# Altium PCB Arduino Nano.PcbDoc
Units mil, origin at the board's own origin, x right, y up, seen from the top; angles counter-clockwise.
Board outline 730 x 1700 mil, 4 copper layers (Top Layer, Signal Layer Top, Signal Layer Bottom, Bottom Layer), stack 23.756 mil thick; 25 components, 41 nets, 170 pads, 45 vias.
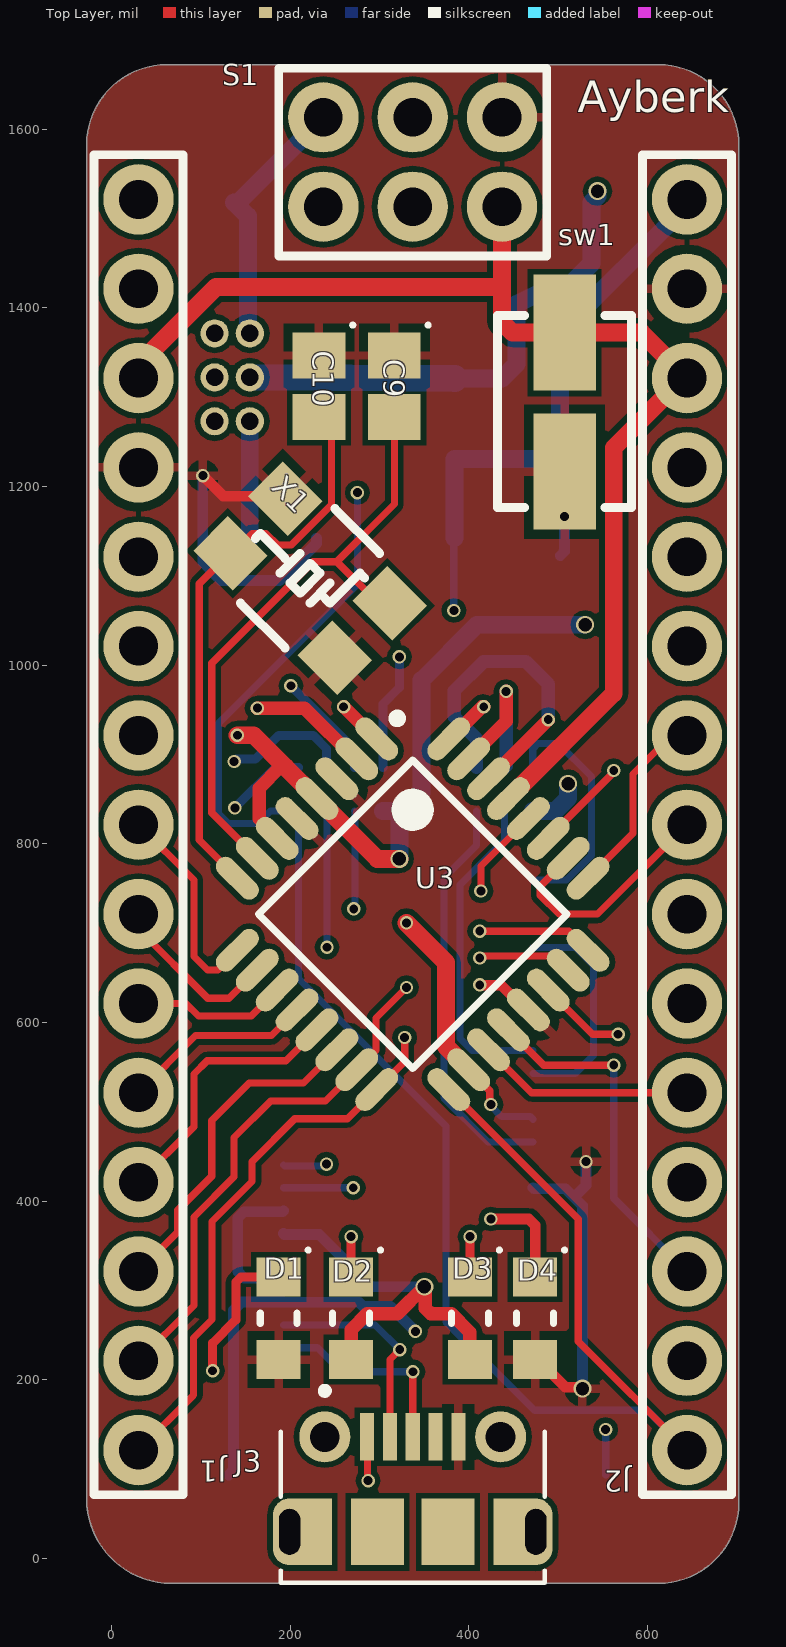
[diagram p0: Top Layer view]
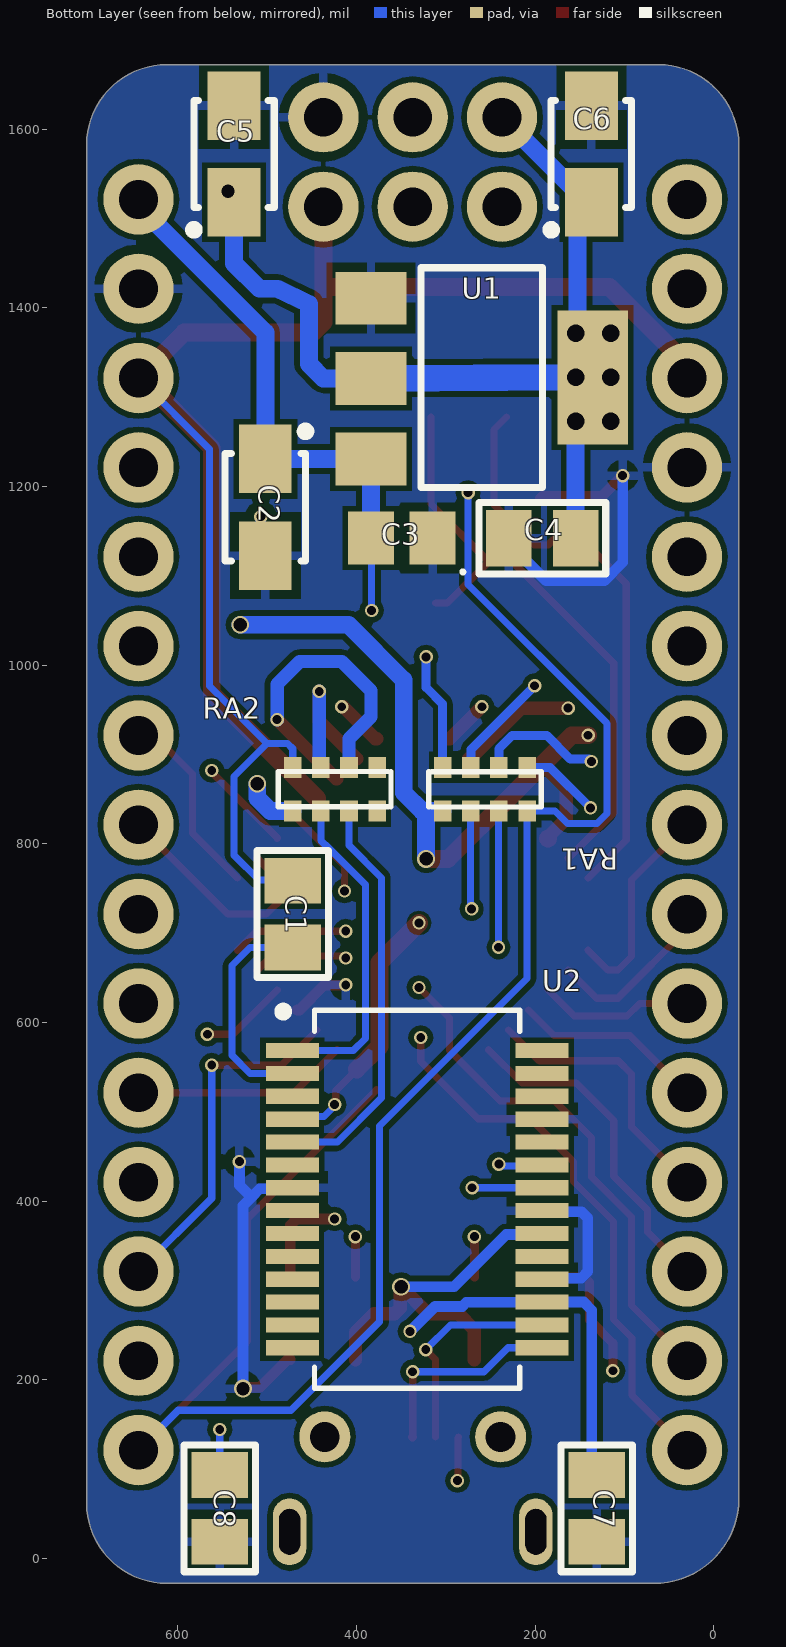
[diagram p1: Bottom Layer view, seen from below]
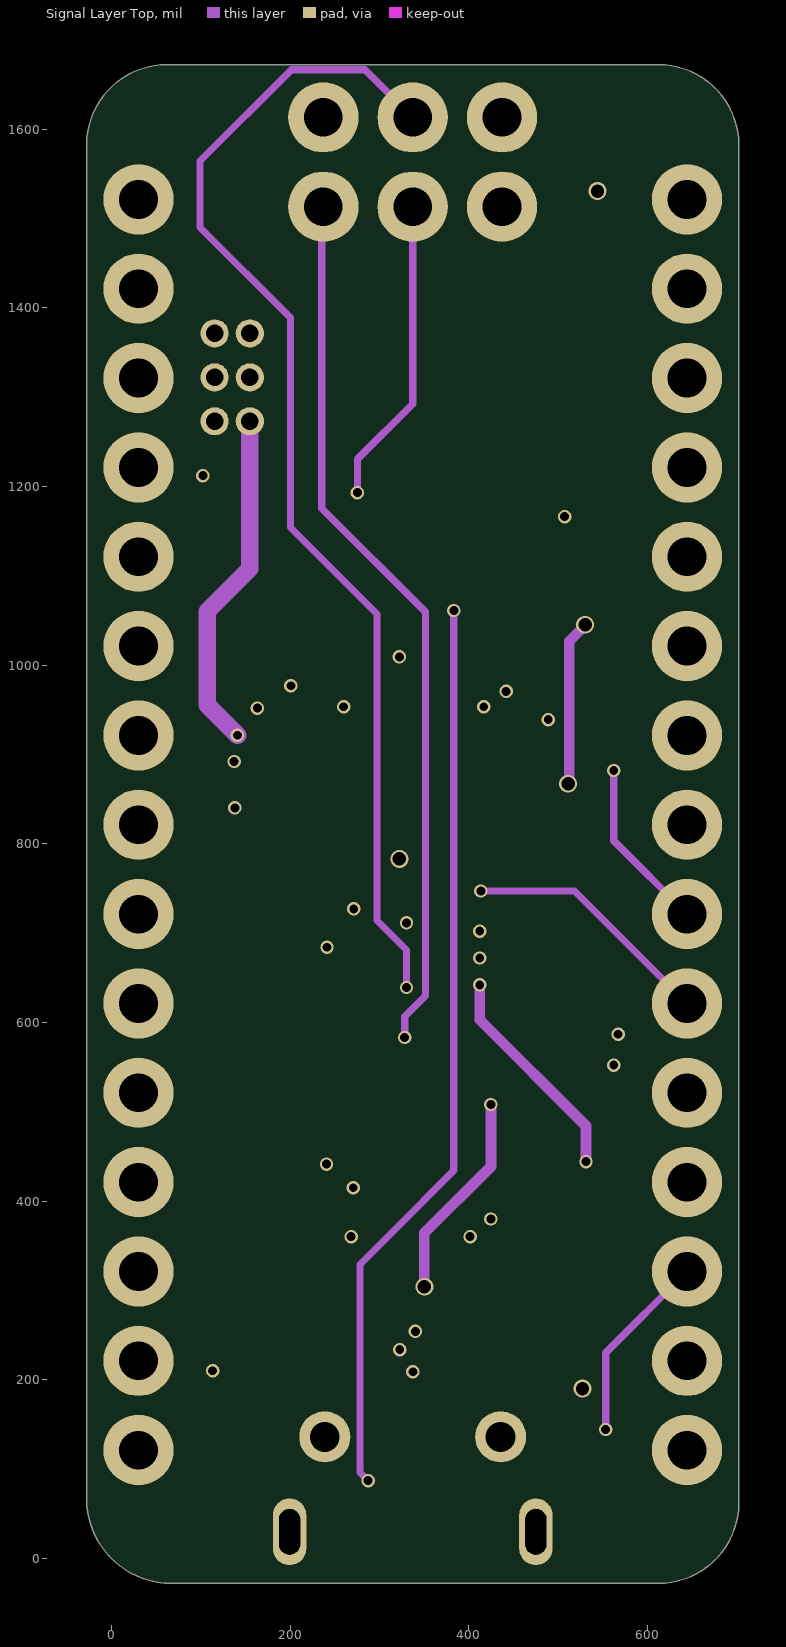
[diagram p2: Signal Layer Top]
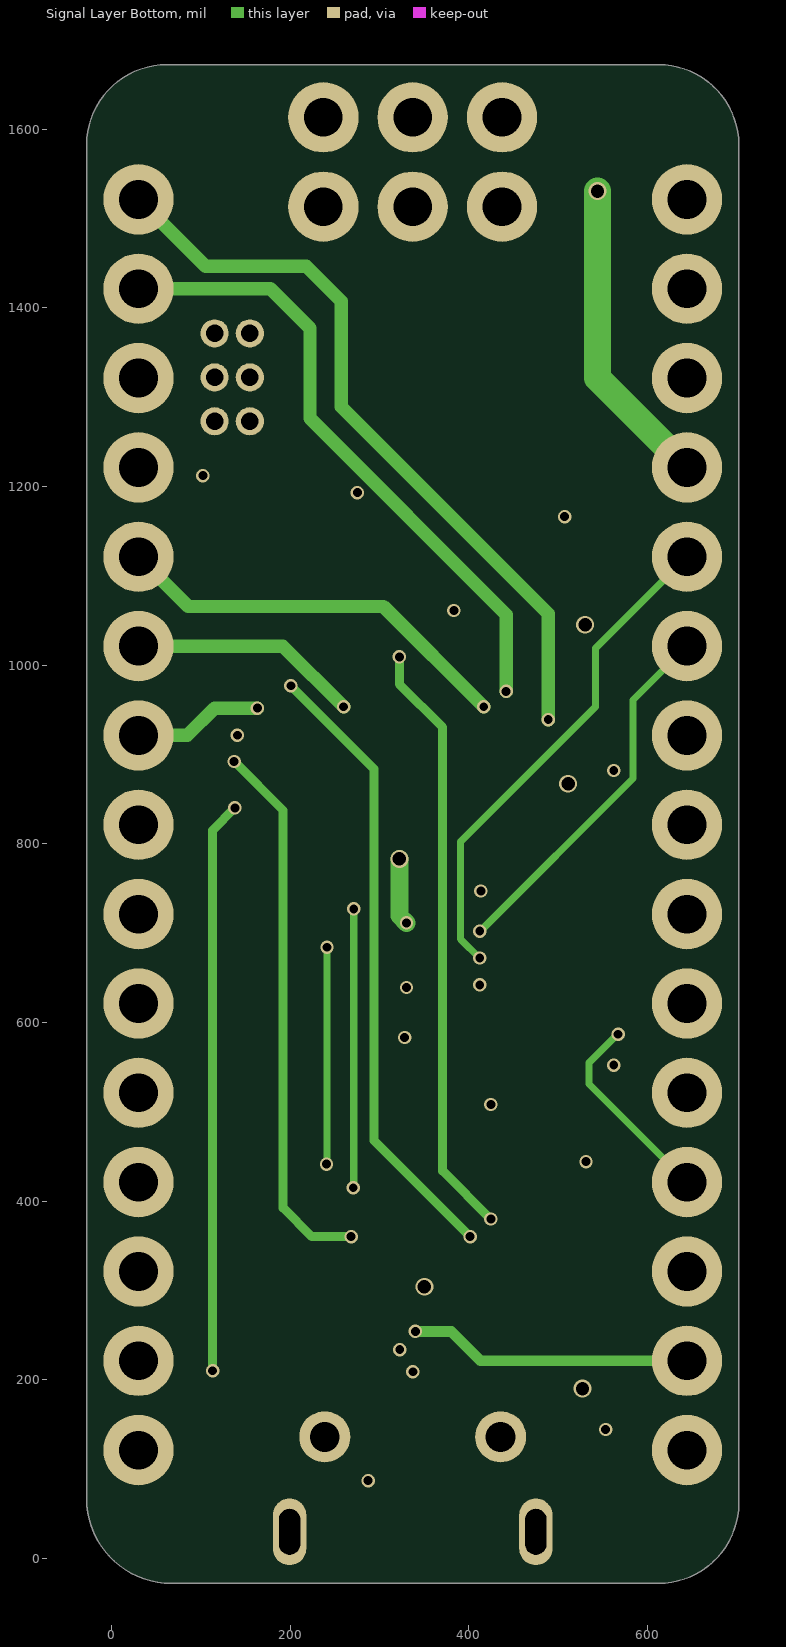
[diagram p3: Signal Layer Bottom]

## Layer stack, top to bottom
Top Solder: solder mask 0.4, Solder Resist, Dk 3.5
Top Layer: signal copper 1.4
Dielectric 3: prepreg 2.8, PP-006, Dk 4.1
Signal Layer Top: signal copper 1.3779
Dielectric 2: prepreg 2.8, PP-006, Dk 4.1
Signal Layer Bottom: signal copper 1.3779
Dielectric 1: dielectric 12.6, FR-4, Dk 4.8
Bottom Layer: signal copper 1.4
Bottom Solder: solder mask 0.4, Solder Resist, Dk 3.5

## Board outline
-27.82,67.18 -27.82,1582.18 cw(c62.18,1582.18) 62.18,1672.18 612.18,1672.18 cw(c612.18,1582.18) 702.18,1582.18 702.18,62.18 cw(c612.18,62.18) 612.18,-27.82 67.18,-27.82 cw(c67.18,67.18)

## Design rules (kind name [scope] priority, off if disabled: settings)
Clearance [All] p1: gap=6 ignorepadtopadclearanceinfootprint=FALSE
MinimumSolderMaskSliver [All] p1: minsoldermaskwidth=1
PolygonConnect [All] p1: connectstyle=Relief reliefconductorwidth=10 reliefentries=4 polygonreliefangle="90 Angle" airgapwidth=10
RoutingVias [All] p1: holewidth=10 width=15 viastyle="Through Hole" minholewidth=10 minwidth=15 maxholewidth=28 maxwidth=50
SilkToSilkClearance [All] p1: silktosilkclearance=6
SilkToSolderMaskClearance [IsPad] p1: minsilkscreentomaskgap=0 clearancetoexposedcopper=TRUE
SolderMaskExpansion [All] p1: expansion=4
Width [All] p1: maxlimit=30 minlimit=8 preferedwidth=8 minimp=50.000000 maximp=50.000000 favimp=50.000000
27 further rules are at their usual default settings.

## Components (designator, comment, footprint, x,y, rotation, side; value= is the part's Value field where it differs from the comment)
C1 "100nF" MY_0805 471.52,721.32 r270 bottom
C2 "Capacitor SMT Tantalum" "CASE A - 3216X18" 502.18,1176.69 r270 bottom value=4.7µF
C3 "100nF Ceramic Multilayer Capacitor_1" CAPCP2012X09N 349.42,1142.18 r0 bottom
C4 "100nF" MY_0805 192.18,1142.18 r180 bottom
C5 "Capacitor SMT Tantalum" "CASE A - 3216X18" 537.18,1572.18 r90 bottom value=4.7µF
C6 "Capacitor SMT Tantalum" "CASE A - 3216X18" 137.18,1572.18 r90 bottom value=4.7µF
C7 "100nF" MY_0805 131.18,56.18 r90 bottom
C8 "100nF" MY_0805 553.18,56.18 r90 bottom
C9 "C0805C180J5GACTU" CAPCP2012X09N 316.61,1312.18 r270 top
C10 "C0805C180J5GACTU" CAPCP2012X09N 232.18,1312.18 r270 top
D1 "Kingbright Orange LED, 200 mcd 120 ° 0805" LED1913X12NYEL/ORANGE 187.18,268.92 r270 top
D2 "Kingbright Green LED, 70 mcd 120 ° 0805" LED1913X12NGREEN 268.18,268.92 r270 top
D3 "Kingbright Red LED, 100 mcd 120 ° 0805" LED1913X12NRED 401.18,268.92 r270 top
D4 "Kingbright Blue LED, 60 mcd 120 ° 0805" LED1913X12NBLUE 474.18,268.92 r270 top
J1 "connector;str header;single row;.1 cont centers;.095 tail;gold or gtx;36 contact" Header 30.18,1521.32 r270 top
J2 "connector;str header;single row;.1 cont centers;.095 tail;gold or gtx;36 contact" Header 644.18,1521.32 r270 top
J3 "Molex - Micro USB" MOLEX_1050170001 337.18,43.66 r0 top
RA1 "680+- 5% SMT Resistor Array" "1206 RA" 209.18,841.6 r0 bottom
RA2 "1k +- 5% SMT Resistor Array" "1206 RA" 471.52,880.6 r180 bottom
S1 "Programming Headers Dual Row" "ISP HEADER" 237.18,1513.18 r0 top
sw1 "Tac switch" MY_PB-SMD 507.18,1216.59 r90 top
U1 "LM1117" MY_SOT223 257.18,1322.18 r270 bottom
U2 "FT232RL" SSOP-28-FT232RL 332.18,402.18 r180 bottom
U3 "ATMEGA328P-AU" TQFP80P900X900X120-32N 337.18,721.18 r315 top
X1 "Aker 16MHz Crystal SMT" "Aker S5C Crystal" 311.34,1069.5 r315 top value=16MHz

## Footprints (in the part's own frame and the unit in brackets; to place one, negate y for a bottom-side part, rotate by r counter-clockwise, add the part's x,y. Pads: shape width x height; smd on the part's side, far side on the other; paste and mask are expansions set on the pad)
"1206 RA" [mm]
  rect 0.5x0.6 smd: 1(0,0.127) 2(0.8,0.127) 3(1.6,0.127) 4(2.4,0.127) 5(0,-1.118) 6(0.8,-1.118) 7(1.6,-1.118) 8(2.4,-1.118)
  silkscreen extent -0.41,-0.99 2.79,0.01, body extent -0.41,-1.31 2.79,0.29, height 0.5
"Aker S5C Crystal" [mm]
  rect 1.6x1.4 smd: 1(0,0) 2(-4.2,0) 3(0,-2.2) 4(-4.2,-2.2)
  round 0.254 on Top Overlay: 5(-3,-2.4)
  silkscreen extent -4,-3 -1,0.8, body extent -4.7,-2.8 0.5,0.6, height 1
CAPCP2012X09N [mm] "Chip Capacitor, 2-Leads, Body 2.00x1.25mm, IPC Medium Density"
  rect 1.3x1.5 smd: 1(-0.875,0) 2(0.875,0)
  silkscreen extent -1.79,0.91 -1.69,1.01, body extent -1.05,-0.57 0.95,0.68, height 0.78
"CASE A - 3216X18" [mm] "Molded Capacitor, 2-Leads, Body 3.2x1.6mm, IPC Medium Density"
  rect 1.95x1.5 smd: 1(-1.375,0) 2(1.375,0)
  silkscreen extent -2.28,-1.14 1.52,1.27, body extent -1.52,-0.76 1.65,0.84, height 1.77
Header [mm] "SIL Header"
  round 2 hole 1.1: 1(0,0) 2(2.54,0) 3(5.08,0) 4(7.62,0) 5(10.16,0) 6(12.7,0) 7(15.24,0) 8(17.78,0) 9(20.32,0) 10(22.86,0) 11(25.4,0) 12(27.94,0) 13(30.48,0) 14(33.02,0) 15(35.56,0)
  silkscreen extent -1.27,-1.27 36.83,1.27, body extent -1.33,-1.35 36.93,1.35, height 8.6
"ISP HEADER" [mm] "SIL Header for programming"
  round 2 hole 1.1: 1(0,0) 2(0,2.54) 3(2.54,0) 4(2.54,2.54) 5(5.08,0) 6(5.08,2.54)
  silkscreen extent -1.27,-1.4 6.35,3.94, body extent -1.27,-1.27 6.35,3.81, height 8
LED1913X12NBLUE [mm] "LED 2-Leads, Body 1.90x1.32mm, IPC Medium Density"
  rect 1.1x1.25 smd: 1(-1.175,0) 2(1.175,0)
  silkscreen extent -1.99,-0.53 0.15,0.89, body extent -1,-0.62 1.02,0.62, height 1.1
LED1913X12NGREEN [mm] "LED 2-Leads, Body 1.90x1.32mm, IPC Medium Density"
  rect 1.1x1.25 smd: 1(-1.175,0) 2(1.175,0)
  silkscreen extent -1.99,-0.53 0.15,0.89, body extent -1.01,-0.62 1.01,0.63, height 1.1
LED1913X12NRED [mm] "LED 2-Leads, Body 1.90x1.32mm, IPC Medium Density"
  rect 1.1x1.25 smd: 1(-1.175,0) 2(1.175,0)
  silkscreen extent -1.99,-0.53 0.15,0.89, body extent -1.02,-0.43 1.04,0.47, height 0.85
LED1913X12NYEL/ORANGE [mm] "LED 2-Leads, Body 1.90x1.32mm, IPC Medium Density"
  rect 1.1x1.25 smd: 1(-1.175,0) 2(1.175,0)
  silkscreen extent -1.99,-0.53 0.15,0.89, body extent -1.01,-0.62 1.01,0.63, height 1.1
MOLEX_1050170001 [mm]
  rect 0.4x1.35 smd: 1(-1.3,2.35) 2(-0.65,2.35) 3(0,2.35) 4(0.65,2.35)
  rect 0.4x1.35 smd mask+0.102: 5(1.3,2.35)
  round 1.45 hole 0.85: SH1(-2.5,2.35) SH2(2.5,2.35)
  oval 0.95x1.9 hole 0.6 slot 1.3 at 90 deg: SH3(-3.5,-0.35) SH8(3.5,-0.35)
  rect 1.2x1.9 smd: SH4(-2.9,-0.35) SH7(2.9,-0.35)
  rect 1.5x1.9 smd: SH5(-1,-0.35) SH6(1,-0.35)
  silkscreen extent -3.75,-1.8 3.75,3.76, body extent -4,-2.82 4,2.58, height 2.75
MY_0805 [mm]
  rect 1.3x1.6 smd: 1(-0.95,0) 2(0.95,0)
  silkscreen extent -1.8,-1.02 1.8,1.02, body extent -1,-0.62 1,0.63, height 0.59
MY_PB-SMD [mil] "Switch; 2 Leads"
  rect 130x70 smd: 1(0,0) 2(155.59,0)
  silkscreen extent -40,-75 175,75, body extent -1,-49 156,49, height 63
MY_SOT223 [mm]
  rect 1.499x2.007 smd: 1(-2.252,-3.218) 2(0.034,-3.218) 3(2.32,-3.218)
  round 0.8 hole 0.5: 2(-1.25,2.6) 2(-1.25,3.6) 2(0,2.6) 2(0,3.6) 2(1.25,2.6) 2(1.25,3.6)
  rect 3.81x2.007 smd: 2(0.009,3.081)
  silkscreen extent -3.12,-1.8 3.13,1.66, body extent -3.25,-3.68 3.25,3.32, height 1.67
SSOP-28-FT232RL [mil] "FT232R USB UART IC"
  rect 59.5x17 smd paste+0 mask+0: 1(-139.75,166.34) 2(-139.75,140.75) 3(-139.75,115.16) 4(-139.75,89.57) 5(-139.75,63.98) 6(-139.75,38.39) 7(-139.75,12.8) 8(-139.75,-12.8) 9(-139.75,-38.39) 10(-139.75,-63.98) 11(-139.75,-89.57) 12(-139.75,-115.16) 13(-139.75,-140.75) 14(-139.75,-166.34) 15(139.75,-166.34) 17(139.75,-115.16) 18(139.75,-89.57) 19(139.75,-63.98) 20(139.75,-38.39) 21(139.75,-12.8) 22(139.75,12.8) 23(139.75,38.39) 24(139.75,63.98) 25(139.75,89.57) 26(139.75,115.16) 27(139.75,140.75) 28(139.75,166.34)
  rect 59.5x17 smd paste+0 mask+4: 16(139.75,-140.75)
  silkscreen extent -155,-212 115,215, body extent -153,-203 153,203, height 85
TQFP80P900X900X120-32N [mm] "TQFP, 32-Leads, Body 7,00x7,00mm, Pitch 0,80mm, IPC Medium Density"
  oval 1.5x0.55 smd: 1(-4.25,2.8) 2(-4.25,2) 3(-4.25,1.2) 4(-4.25,0.4) 5(-4.25,-0.4) 6(-4.25,-1.2) 7(-4.25,-2) 8(-4.25,-2.8) 17(4.25,-2.8) 18(4.25,-2) 19(4.25,-1.2) 20(4.25,-0.4) 21(4.25,0.4) 22(4.25,1.2) 23(4.25,2) 24(4.25,2.8)
  oval 0.55x1.5 smd: 9(-2.8,-4.25) 10(-2,-4.25) 11(-1.2,-4.25) 12(-0.4,-4.25) 13(0.4,-4.25) 14(1.2,-4.25) 15(2,-4.25) 16(2.8,-4.25) 25(2.8,4.25) 26(2,4.25) 27(1.2,4.25) 28(0.4,4.25) 29(-0.4,4.25) 30(-1.2,4.25) 31(-2,4.25) 32(-2.8,4.25)
  silkscreen extent -4.37,-3.1 3.1,3.75, body extent -4.5,-4.5 4.5,4.5, height 1.21

## Part data
C1 C4 C7 C8: library part "Cap ceramic", "None polar capacitor", ASiD Part Number=C-AS, Volte=50v
C2 C5 C6: library part "4.7µF Tant RS 496-3545", "Capacitor,tantalum,SMT,16V,4.7uF,10%,A-case", Package=3216-18, Tolerance=10%, Voltage=16V, ComponentLink1Description="Supplier Website", ComponentLink1URL=http://za.rs-online.com/web/search/searchBrowseAction.html?method=getProduct&R=4963545, ComponentLink2Description="RS Data sheet", ComponentLink2URL=http://docs-europe.origin.electrocomponents.com/webdocs/04ed/0900766b804ed4cc.pdf, LatestRevisionDate=28-April-2010, Part Originator="H Theron", Publisher=DPSS, RS Stock Nr.=496-3545
C3: "AVX 0805 Standard 100nF Ceramic Multilayer Capacitor, 50 V dc X7R Dielectric ±10% SMD", Capacitance=100nF, Manufacturer=AVX, Package=0805, Voltage=50V, Creator="Ritesh Kanjee", Datasheet URL=http://za.rs-online.com/web/p/ceramic-multilayer-capacitors/4646688/, Date Created="18 February 2015", RS Stock No.=464-6688
C9 C10: library part "18pF Ceramic Multilayer Capacitor, 50 V dc C0G Dielectric ±5% SMD", "18pF Ceramic Multilayer Capacitor, 50 V dc C0G Dielectric ±5% SMD", Capacitance=18pF, Manufacturer=Kemet, Package=0805, Voltage=50V, Creator="Ayberk Özkan", Datasheet URL=http://za.rs-online.com/web/p/ceramic-multilayer-capacitors/6480935/?searchTerm=C0805C180J5GACTU&relevancy-data=636F3D3226696E3D4931384E4B6E6F776E41734D504E266C753D656E266D6D3D6D61746368616C6C7061727469616C26706D3D5E5B5C707B4C7D5C707B4E647D2D2C2F255C2E5D2B2426706F3D313326736E3D592673743D4D414E5F504152545F4E554D4245522677633D424F5448267573743D4330383035433138304A35474143545526, Date Created="18 February 2015", RS Stock No.=648-0935
D1: Color=Orange, Forward Voltage=1.85V, Manufacturer=KingBright, Manufacturer Part No.=KP-2012SEC, Creator="Ayberk Özkan", Datasheet URL=http://za.rs-online.com/web/p/visible-leds/4663790/, Date Created="18 February 2015", RS Stock No.=466-3790
D2: Color=Green, Forward Voltage="2.1 V", Manufacturer=KingBright, Manufacturer Part No.=KP-2012MGC, Creator="Ayberk Özkan", Datasheet URL=http://za.rs-online.com/web/p/visible-leds/4663778/, Date Created="18 February 2015", RS Stock No.=466-3778
D3: Color=RED, Forward Voltage=1.85V, Manufacturer=KingBright, Manufacturer Part No.=KP-2012SRC-PRV, Creator="Ayberk Özkan", Datasheet URL=http://za.rs-online.com/web/p/visible-leds/4663813/, Date Created="18 February 2015", RS Stock No.=466-3813
D4: Color=Blue, Forward Voltage=3.2V, Manufacturer=KingBright, Manufacturer Part No.=KP-2012PBC-A, Creator="Ayberk Özkan", Datasheet URL=http://za.rs-online.com/web/p/visible-leds/4663784/, Date Created="18 February 2015", RS Stock No.=466-3784
J1 J2: library part "Single row; PCB headers", Current Rating="3Amps Continuous", Manufacturer=FCI, Manufacturer Part No.=68000-236HLF, Created By="Ayberk Özkan", Date Created="1 March 2015", RS Stock No.=2509565626
J3: library part "Molex - Micro USB Connector 30V, 1.8A", "Molex USB Connector, SMT, Socket B, Solder, Right Angle", ComponentLink1Description=rsdelivers, ComponentLink1URL=https://mt.rsdelivers.com/product/molex/105017-0001/molex-usb-connector-smt-socket-b-solder-right/8486764, ComponentLink2Description=datasheet, ComponentLink2URL=https://docs.rs-online.com/4d62/0900766b813885f7.pdf
RA1: library part "680 +- 5% SMT Resistor Array 4 Res 1206", "680 +- 5% SMT Resistor Array 4 Res 1206", Manufacturer=Bourns, Manufacturer Part No.=CAY16-681J4LF, Creator="Ayberk Özkan", Date Created="25 February 2015", RS Stock No.=552-5579, Wattage=0.25W
RA2: "1k +- 5% SMT Resistor Array 4 Res", Manufacturer=Bourns, Manufacturer Part No.=CAY16-102J4LF, Creator="Ayberk Özkan", Date Created="25 February 2015", RS Stock No.=552-5579, Wattage=0.25W
S1: library part "Programming ISP, Programming Headers Dual Row"
sw1: library part "Tac switch_1", "small tac switch", ASiD Part Number="Tac switch-AS"
U1: "Low Drop Voltage Reg", ASiD Part Number=LM1117-AS
U2: "USB Bridge, USB to UART USB 2.0 UART Interface 28-SSOP", ComponentLink1Description=SnapEda, ComponentLink1URL=https://www.snapeda.com/parts/FT232RL/FTDI,%20Future/view-part/?ref=search&t=ft232rl, ComponentLink3Description=UltraLibrarian, ComponentLink3URL=https://app.ultralibrarian.com/details/e192f762-2577-11e9-ab3a-0a3560a4cccc/FTDI-Future-Technology-Devices-International-Ltd/FT232RL?open=backlink&exports=AltiumDesigner&exports=AltiumPCADV15, ComponentLink4Description=Datasheet, ComponentLink4URL=https://www.ftdichip.com/Support/Documents/DataSheets/ICs/DS_FT232R.pdf
U3: library part AtmelMicrocontroller, "ATmega48A/PA/88A/PA/168A/PA/328/P", ComponentLink1Description=Datasheet, ComponentLink1URL=https://docs.rs-online.com/5775/0900766b80db4deb.pdf, ComponentLink2Description=za.rs-online, ComponentLink2URL=https://za.rs-online.com/web/p/microcontrollers/6963092/?searchTerm=6963092&relevancy-data=636F3D3126696E3D4931384E525353746F636B4E756D6265724D504E266C753D656E266D6D3D6D61746368616C6C26706D3D5E5C647B367D247C5E5C647B377D247C5E5C647B31307D2426706F3D313426736E3D592673743D52535F53544F434B5F4E554D4245522677633D4E4F4E45267573743D3639363330393226, Created By=Ayberk, Tarih=11.12.2020
X1: library part "Aker  C5S-16.000-12-3030-X", "Aker S5C SMT Crystal", Frequency Stability=+/-30ppm, Load Capacitance=12pF, Manufacturer=Aker, Manufacturer Part #=C5S-16.000-12-3030-X, Package="3.2x5mm SMD", Creator="Ayberk Özkan", HelpURL=http://za.rs-online.com/web/p/crystal-units/6719488/, RS="RS 671-9488", RS Stock Nr.=671-9488, Supplier=RS

## Via types
v1: diameter 15, hole 10, Top Layer to Bottom Layer, 39 vias
v2: diameter 20, hole 15, Top Layer to Bottom Layer, 6 vias

## Nets (pads, with @x,y where several pads share a name; then routed paths per layer and width w, separated by ;. In a path a pad name is that pad's centre, name@x,y a point inside that pad or via, vN(x,y) a via of type N, cw(c..) or ccw(c..) an arc to the next point about the centre after c; other vN are vias at no path point)
3V3: C7.2 J2.14 U2.17 | length 725.1
  Signal Layer Bottom w12: v1(340.18,254.18) 380.18,254.18 413.03,221.32 J2.14
  Bottom Layer w12: C7.2 136.68,99.08 136.68,278 145.69,287.02 U2.17 192.57,286.87 277.15,286.87 281.85,282.18 312.18,282.18 v1(340.18,254.18)
+5: C4.2 C5.1 C6.1 D2.2 D3.2 J2.4 RA1.4 RA2.5 S1.2 U1.2 U2.4 U2.20 U3.4 U3.6 U3.18 | length 3789.6
  Top Layer w8: U3.18 423.34,523.66 423.34,509.52 v1(424.68,508.18)
  Top Layer w15: U3.6 185.45,807.88 165.18,828.16 165.18,862.18 189.06,886.06 194.56,886.06 ; D2.2 268.18,256.18 286.18,274.18 320.18,274.18 v2(350.18,304.18) 351.13,303.22 351.13,280.22 357.18,274.18 380.18,274.18 401.18,253.18 D3.2
  Top Layer w20: v1(140.91,921.49) 159.13,921.49 194.56,886.06 U3.4 297.45,783.18 v2(322.18,783.18) ; U3.6 U3.6@185.9,806.08 ; v1(330.18,711.42) 374.37,667.23 374.37,573.08 399.81,547.63 U3.18
  Signal Layer Top w12: v2(350.18,304.18) 350.18,364.26 424.68,438.76 v1(424.68,508.18) ; v2(511.18,867.18) 511.18,867.99 512.4,869.21 512.4,1026.89 530.18,1044.67 v2(530.18,1045.18)
  Signal Layer Top w20: v1(140.91,921.49) 107.18,955.23 107.18,1060.21 154.81,1107.85 U1.2@154.81,1272.96
  Signal Layer Bottom w20: v2(322.18,783.18) 322.18,719.42 v1(330.18,711.42)
  Signal Layer Bottom w30: v2(544,1530.66) 544,1321.49 J2.4
  Bottom Layer w8: v1(424.68,508.18) 424.68,506.53 436.38,494.83 468.83,494.83 U2.4
  Bottom Layer w12: U2.20 193.52,362.7 232.44,362.7 290.96,304.18 v2(350.18,304.18)
  Bottom Layer w20: C4.2 U1.2@154.79,1272.94 ; U1.2@154.81,1371.39 152.61,1373.59 152.61,1502.6 C6.1 142.04,1518.04 S1.2 ; RA1.4 326.61,836.61 ; v2(322.18,783.18) 322.18,832.18 326.61,836.61 ; U1.2@383.87,1320.83 437.28,1320.83 453.41,1336.96 453.41,1404.17 488.57,1421.32 508.84,1421.32 537.18,1449.66 C5.1 544,1524.87 v2(544,1530.66) ; RA2.5 496.61,836.61 511.18,851.18 v2(511.18,867.18) ; v2(530.18,1045.18) 409.18,1045.18 347.19,983.19 347.19,857.19 326.61,836.61
  Bottom Layer w30: U1.2@154.81,1322.18 U1.2@383.87,1320.83
A0: J2.5 U3.23 | length 669.7
  Top Layer w8: v1(412.18,672.18) 414.32,674.32 495.39,674.32 U3.23
  Signal Layer Bottom w8: v1(412.18,672.18) 411.77,672.18 390.68,693.27 390.68,802.26 541.85,953.44 541.85,1019 J2.5
A1: J2.6 U3.24 | length 545.7
  Top Layer w8: v1(412.18,702.18) 512.07,702.18 U3.24
  Signal Layer Bottom w8: v1(412.18,702.18) 412.69,702.18 583.68,873.16 583.68,960.82 J2.6
A2: J2.7 U3.25 | length 215.8
  Top Layer w8: U3.25 583.68,811.78 583.68,878.11 626.89,921.32 J2.7
A3: J2.8 U3.26 | length 268.8
  Top Layer w8: U3.26 479.92,752.56 479.92,742.34 500.93,721.32 544.18,721.32 J2.8
A4: J2.9 U3.27 | length 301.1
  Top Layer w8: U3.27 488.9,806.76 562.18,880.03 v1(562.18,882.07)
  Signal Layer Top w8: v1(562.18,882.07) 562.18,803.32 J2.9
A5: J2.10 U3.28 | length 386
  Top Layer w8: v1(413.49,747.18) 413.49,775.22 U3.28
  Signal Layer Top w8: v1(413.49,747.18) 518.32,747.18 J2.10
A6: J2.11 U3.19 | length 242
  Top Layer w8: U3.19 470.21,521.32 J2.11
A7: J2.12 U3.22 | length 323.5
  Top Layer w8: U3.22 538.37,586.79 v1(567.11,586.79)
  Signal Layer Bottom w8: v1(567.11,586.79) 566.39,586.79 534.5,554.9 534.5,531 J2.12
AREF: C8.2 J2.13 U3.20 | length 664.6
  Top Layer w8: U3.20 483.91,552.18 v1(562.18,552.18)
  Signal Layer Top w8: v1(553.18,144.38) 553.18,230.32 J2.13
  Bottom Layer w8: C8.2 553.04,93.71 553.18,93.85 v1(553.18,144.38) ; v1(562.18,552.18) 562.18,403.32 J2.13
D2: J1.5 U3.32 | length 510
  Top Layer w15: U3.32 379.13,917.44 415.12,953.44 v1(416.65,953.44)
  Signal Layer Bottom w15: J1.5 85.89,1065.61 304.47,1065.61 v1(416.65,953.44)
D3: J1.6 U3.1 | length 309.7
  Top Layer w15: v1(259.76,953.44) 295.75,917.44 U3.1
  Signal Layer Bottom w15: J1.6 191.87,1021.32 v1(259.76,953.44)
D4: J1.7 U3.2 | length 280.5
  Top Layer w15: v1(163.18,951.89) 216.01,951.89 272.74,895.17 U3.2
  Signal Layer Bottom w15: J1.7 84.78,921.32 115.35,951.89 v1(163.18,951.89)
D5: J1.8 U3.9 | length 237.2
  Top Layer w8: J1.8 92.18,759.32 92.18,673.99 107.42,658.75 118.85,658.75 U3.9
D6: J1.9 U3.10 | length 194.8
  Top Layer w8: J1.9 30.18,704.63 107.63,627.18 131.57,627.18 162.94,658.54 U3.10
D7: J1.10 U3.11 | length 173.2
  Top Layer w8: J1.10 83.1,621.32 97.25,607.18 156.36,607.18 U3.11
D8: J1.11 U3.12 | length 215.9
  Top Layer w8: J1.11 94.14,585.29 179.02,585.29 U3.12
D9: J1.12 U3.13 | length 304.9
  Top Layer w8: J1.12 92.18,483.32 92.18,542.18 107.18,557.18 195.45,557.18 U3.13
D10: J1.13 U3.14 | length 400.3
  Top Layer w8: J1.13@30.18,345.85 J1.13 74.18,365.32 74.18,389.85 112.18,427.85 112.18,490.18 154.18,532.18 214.99,532.18 U3.14
GND: C2.2 C3.1 C4.1 C5.2 C6.2 C7.1 C8.1 C9.1 C10.1 D1.2 D4.2 J1.4 J2.2 J3.5 S1.6 sw1.1 U1.1 U2.7 U2.18 U2.21 U2.25 U3.3 U3.5 U3.21 X1.2 X1.3 | length 1267.7
  Top Layer w12: v1(102.18,1212.18) 125.15,1189.21 191.64,1189.21 X1.2 ; v1(412.18,642.18) 412.75,641.6 436.41,641.6 464.01,614 U3.21 ; D4.2 477.13,222.66 508.08,191.71 525.64,191.71 v2(527.18,190.18)
  Signal Layer Top w12: v1(412.18,642.18) 412.18,603.18 531.18,484.18 v1(531.18,444.18)
  Bottom Layer w12: v1(102.18,1212.18) 102.18,1115.06 122.56,1094.68 187.99,1094.68 229.58,1136.27 C4.1 ; U2.18 191.34,313.7 148.65,313.7 141.18,321.18 141.18,381.26 148.2,388.29 191.34,388.29 U2.21 ; U2.7 473.02,413.88 508.3,413.88 517.74,404.44 ; C2.2 507.18,1127.56 v1(507.18,1166.18) ; v2(527.18,190.18) 527.18,395.01 517.74,404.44 ; v1(531.18,444.18) 531.18,417.88 517.74,404.44
GREEN_TX: RA1.3 U2.22 | length 500.7
  Signal Layer Bottom w8: v1(270.59,414.97) 271.18,415.56 v1(271.18,727.18)
  Bottom Layer w8: U2.22 v1(270.59,414.97) ; v1(271.18,727.18) 272.46,728.46 272.46,836.32 RA1.3
MISO: J1.15 S1.1 U3.16 | length 1608.4
  Top Layer w8: J1.15 91.68,182.82 91.68,246.68 112.39,267.39 112.39,377.14 157.18,421.93 157.18,444.18 205.18,492.18 264.07,492.18 U3.16 328.18,556.28 v1(328.18,583.18)
  Signal Layer Top w8: S1.1 235.37,1511.37 235.37,1175.5 351.68,1059.19 351.68,630.27 328.18,606.77 v1(328.18,583.18)
MOSI: J1.14 S1.4 U3.15 | length 1901.2
  Top Layer w8: J1.14 92.18,283.32 92.18,382.39 137.18,427.39 137.18,471.18 178.18,512.18 239.53,512.18 U3.15 296.18,568.82 296.18,605.18 v1(330.18,639.18)
  Signal Layer Top w8: v1(330.18,639.18) 330.18,681.02 297.18,714.02 297.18,1057.28 200.25,1154.2 200.25,1388.94 99.19,1490 99.19,1564.17 201.57,1666.55 283.81,1666.55 S1.4
NetC1_2: C1.2 U2.2 | length 252.9
  Bottom Layer w8: C1.2 519.39,683.92 539.56,663.76 539.56,563.31 519.18,542.92 U2.2
NetC9_2: C9.2 U3.7 X1.1 | length 693.5
  Top Layer w8: U3.7 112.18,834.82 112.18,1002.18 225.8,1115.8 252.18,1115.8 ; X1.1 298.48,1069.5 252.18,1115.8 ; C9.2 316.61,1180.24 252.18,1115.8
NetC10_2: C10.2 U3.8 X1.4 | length 646.3
  Top Layer w8: U3.8 98.18,804.28 98.18,1091.18 132.18,1125.18 X1.4 135.18,1125.18 157.18,1147.18 173,1147.18 185.52,1134.66 201.35,1134.66 246.18,1179.5 246.18,1263.72 C10.2
NetD1_1: D1.1 RA1.5 | length 890.5
  Top Layer w10: v1(113.18,210.18) 113.18,241.18 139.18,267.18 139.18,309.32 145.03,315.18 D1.1
  Signal Layer Bottom w10: v1(113.18,210.18) 113.18,815.18 v1(138.18,840.18)
  Bottom Layer w10: v1(138.18,840.18) 183.61,885.61 RA1.5
NetD2_1: D2.1 RA1.6 | length 799.5
  Top Layer w10: D2.1 v1(268.18,360.2)
  Signal Layer Bottom w10: v1(137.18,892.18) 192.05,837.3 192.05,392.5 224.35,360.2 v1(268.18,360.2)
  Bottom Layer w10: v1(137.18,892.18) 139.78,894.78 160.81,894.78 187.35,921.32 225.73,921.32 240.67,906.39 RA1.6
NetD3_1: D3.1 RA1.7 | length 865.8
  Top Layer w10: D3.1 401.18,359.95 v1(401.42,360.2)
  Signal Layer Bottom w10: v1(200.77,976.89) 293.68,883.99 293.68,467.94 v1(401.42,360.2)
  Bottom Layer w10: v1(200.77,976.89) 272.18,905.49 RA1.7
NetD4_1: D4.1 RA1.8 | length 913.1
  Top Layer w12: v1(424.68,379.99) 467.15,379.99 474.18,372.96 D4.1
  Signal Layer Bottom w10: v1(322.18,1009.18) 322.18,978.82 370.68,930.32 370.68,433.99 v1(424.68,379.99)
  Bottom Layer w10: RA1.8 303.67,956.46 322.18,974.97 v1(322.18,1009.18)
RED_RX: RA1.2 U2.23 | length 445.6
  Signal Layer Bottom w8: v1(240.69,441.44) 241.18,441.93 v1(241.18,684.18)
  Bottom Layer w8: U2.23 193.58,439.41 238.65,439.41 v1(240.69,441.44) ; RA1.2 240.18,836.08 241.18,835.08 v1(241.18,684.18)
RESET: C1.1 J1.3 J2.3 RA2.1 S1.5 sw1.2 U3.29 | length 2114.7
  Top Layer w8: J2.3@640.1,1321.32 J2.3
  Top Layer w20: J1.3 30.18,1336.68 116.84,1423.35 437.18,1423.35 ; S1.5 437.18,1423.35 ; U3.29 562.18,968.45 562.18,1243.4 J2.3@640.1,1321.32 ; J2.3 593.32,1372.18 sw1.2 448.89,1372.18 437.18,1383.89 437.18,1423.35
  Bottom Layer w8: C1.1 472.19,759.39 509.39,759.39 537.18,787.18 537.18,875.28 500.16,912.29 ; RA2.1 471.52,906.39 477.43,912.29 500.16,912.29 ; J2.3 564.62,1241.77 564.62,976.76 500.16,912.29
RX: J1.1 RA2.3 U3.30 | length 1197.7
  Top Layer w15: U3.30 422.83,872.9 v1(488.9,938.97)
  Signal Layer Bottom w15: J1.1 105.18,1446.32 218.19,1446.32 257.18,1407.34 257.18,1289.18 488.9,1057.45 v1(488.9,938.97)
  Bottom Layer w15: RA2.3 408.53,917.57 383.87,942.24 383.87,971.31 416.65,1004.1 463.72,1004.1 488.9,978.92 v1(488.9,938.97)
RXD: RA2.7 U2.5 | length 456.5
  Bottom Layer w8: RA2.7 408.53,798.32 372.01,761.8 372.01,515.68 421.54,466.15 U2.5
SCK: J2.15 RA1.1 S1.3 U3.17 | length 2352.8
  Top Layer w8: U3.17 522.47,379.99 522.47,243.03 J2.15
  Signal Layer Top w8: v1(275.18,1193.18) 275.18,1230.47 337.18,1292.47 S1.3
  Bottom Layer w8: v1(275.18,1193.18) 275.18,1090.35 119.68,934.85 119.68,833.93 130.93,822.68 164.07,822.68 178,836.61 RA1.1 209.18,649.11 374.24,484.05 374.24,264.96 473.33,165.88 599.62,165.88 J2.15
TX: J1.2 RA2.2 U3.31 | length 886.4
  Top Layer w15: U3.31 441.77,937.13 v1(441.77,970.61)
  Signal Layer Bottom w15: J1.2 178.03,1421.32 222.18,1377.18 222.18,1276.18 441.77,1056.58 v1(441.77,970.61)
  Bottom Layer w15: RA2.2 441.77,887.35 v1(441.77,970.61)
TXD: RA2.6 U2.1 | length 363
  Bottom Layer w8: RA2.6 440.03,803.61 434.73,798.32 434.23,798.32 390.01,754.1 390.01,582.15 403.65,568.51 U2.1
USBDM: J3.2 U2.16 | length 243.9
  Top Layer w8: J3.2 311.59,222.82 v1(322.62,233.86)
  Bottom Layer w8: U2.16 295.05,261.43 v1(322.62,233.86)
USBDP: J3.3 U2.15 | length 228.9
  Top Layer w8: J3.3 v1@337.23,209.01
  Top Layer w10: J3.3 J3.3 ; v1@337.23,209.01 v1(337.28,209.06)
  Bottom Layer w8: U2.15 230.51,235.84 257.3,209.06 v1(337.28,209.06)
VUSB: C2.1 C3.2 J2.1 J3.1 U1.3 | length 1708.3
  Top Layer w8: J3.1 286.58,135.58 286.58,87.77 v1(287.18,87.18)
  Signal Layer Top w8: v1(287.18,87.18) 278.18,96.18 278.18,329.18 315.18,366.18 383.18,434.18 v1(383.18,1061.18)
  Bottom Layer w8: v1(383.18,1061.18) 383.18,1141.49 C3.2
  Bottom Layer w20: C3.2 U1.3 C2.1 502.18,1372.23 644.18,1514.23 J2.1
pads on no net: J3.4 J3.SH1 J3.SH2 J3.SH3 J3.SH4 J3.SH5 J3.SH6 J3.SH7 J3.SH8 RA2.4 RA2.8 U2.3 U2.6 U2.8 U2.9 U2.10 U2.11 U2.12 U2.13 U2.14 U2.19 U2.24 U2.26 U2.27 U2.28 X1.5

## Polygon pours and split planes (outlines as drawn)
GND on Top Layer "GND_L01_P002" (solid, pour order 2): -27.82,67.18 -27.82,1582.18 cw(c62.18,1582.18) 62.18,1672.18 612.18,1672.18 cw(c612.18,1582.18) 702.18,1582.18 702.18,62.18 cw(c612.18,62.18) 612.18,-27.82 67.18,-27.82 cw(c67.18,67.18)
GND on Bottom Layer "GND_L04_P003" (solid, pour order 3): -27.82,67.18 -27.82,1582.18 cw(c62.18,1582.18) 62.18,1672.18 612.18,1672.18 cw(c612.18,1582.18) 702.18,1582.18 702.18,62.18 cw(c612.18,62.18) 612.18,-27.82 67.18,-27.82 cw(c67.18,67.18)

## Silkscreen, mask and mechanical layers (free items; w line width, h text height)
Top Overlay:
  text "Ayberk" at 522.18,1607.18 h60
Mechanical 1:
  the board outline again, w6